# Altium PCB Main ESP32_IoT Gateaway.PcbDoc (part 2 of 4)
Units mm, origin at the board's own origin, x right, y up, seen from the top; angles counter-clockwise.
Board outline 125.73 x 73.66 mm, 4 copper layers (Top Layer, GND, Layer 2, Bottom Layer), stack 0.603 mm thick; 167 components, 121 nets, 681 pads, 324 vias.
Unrouted connection lines stored in the file: 132.
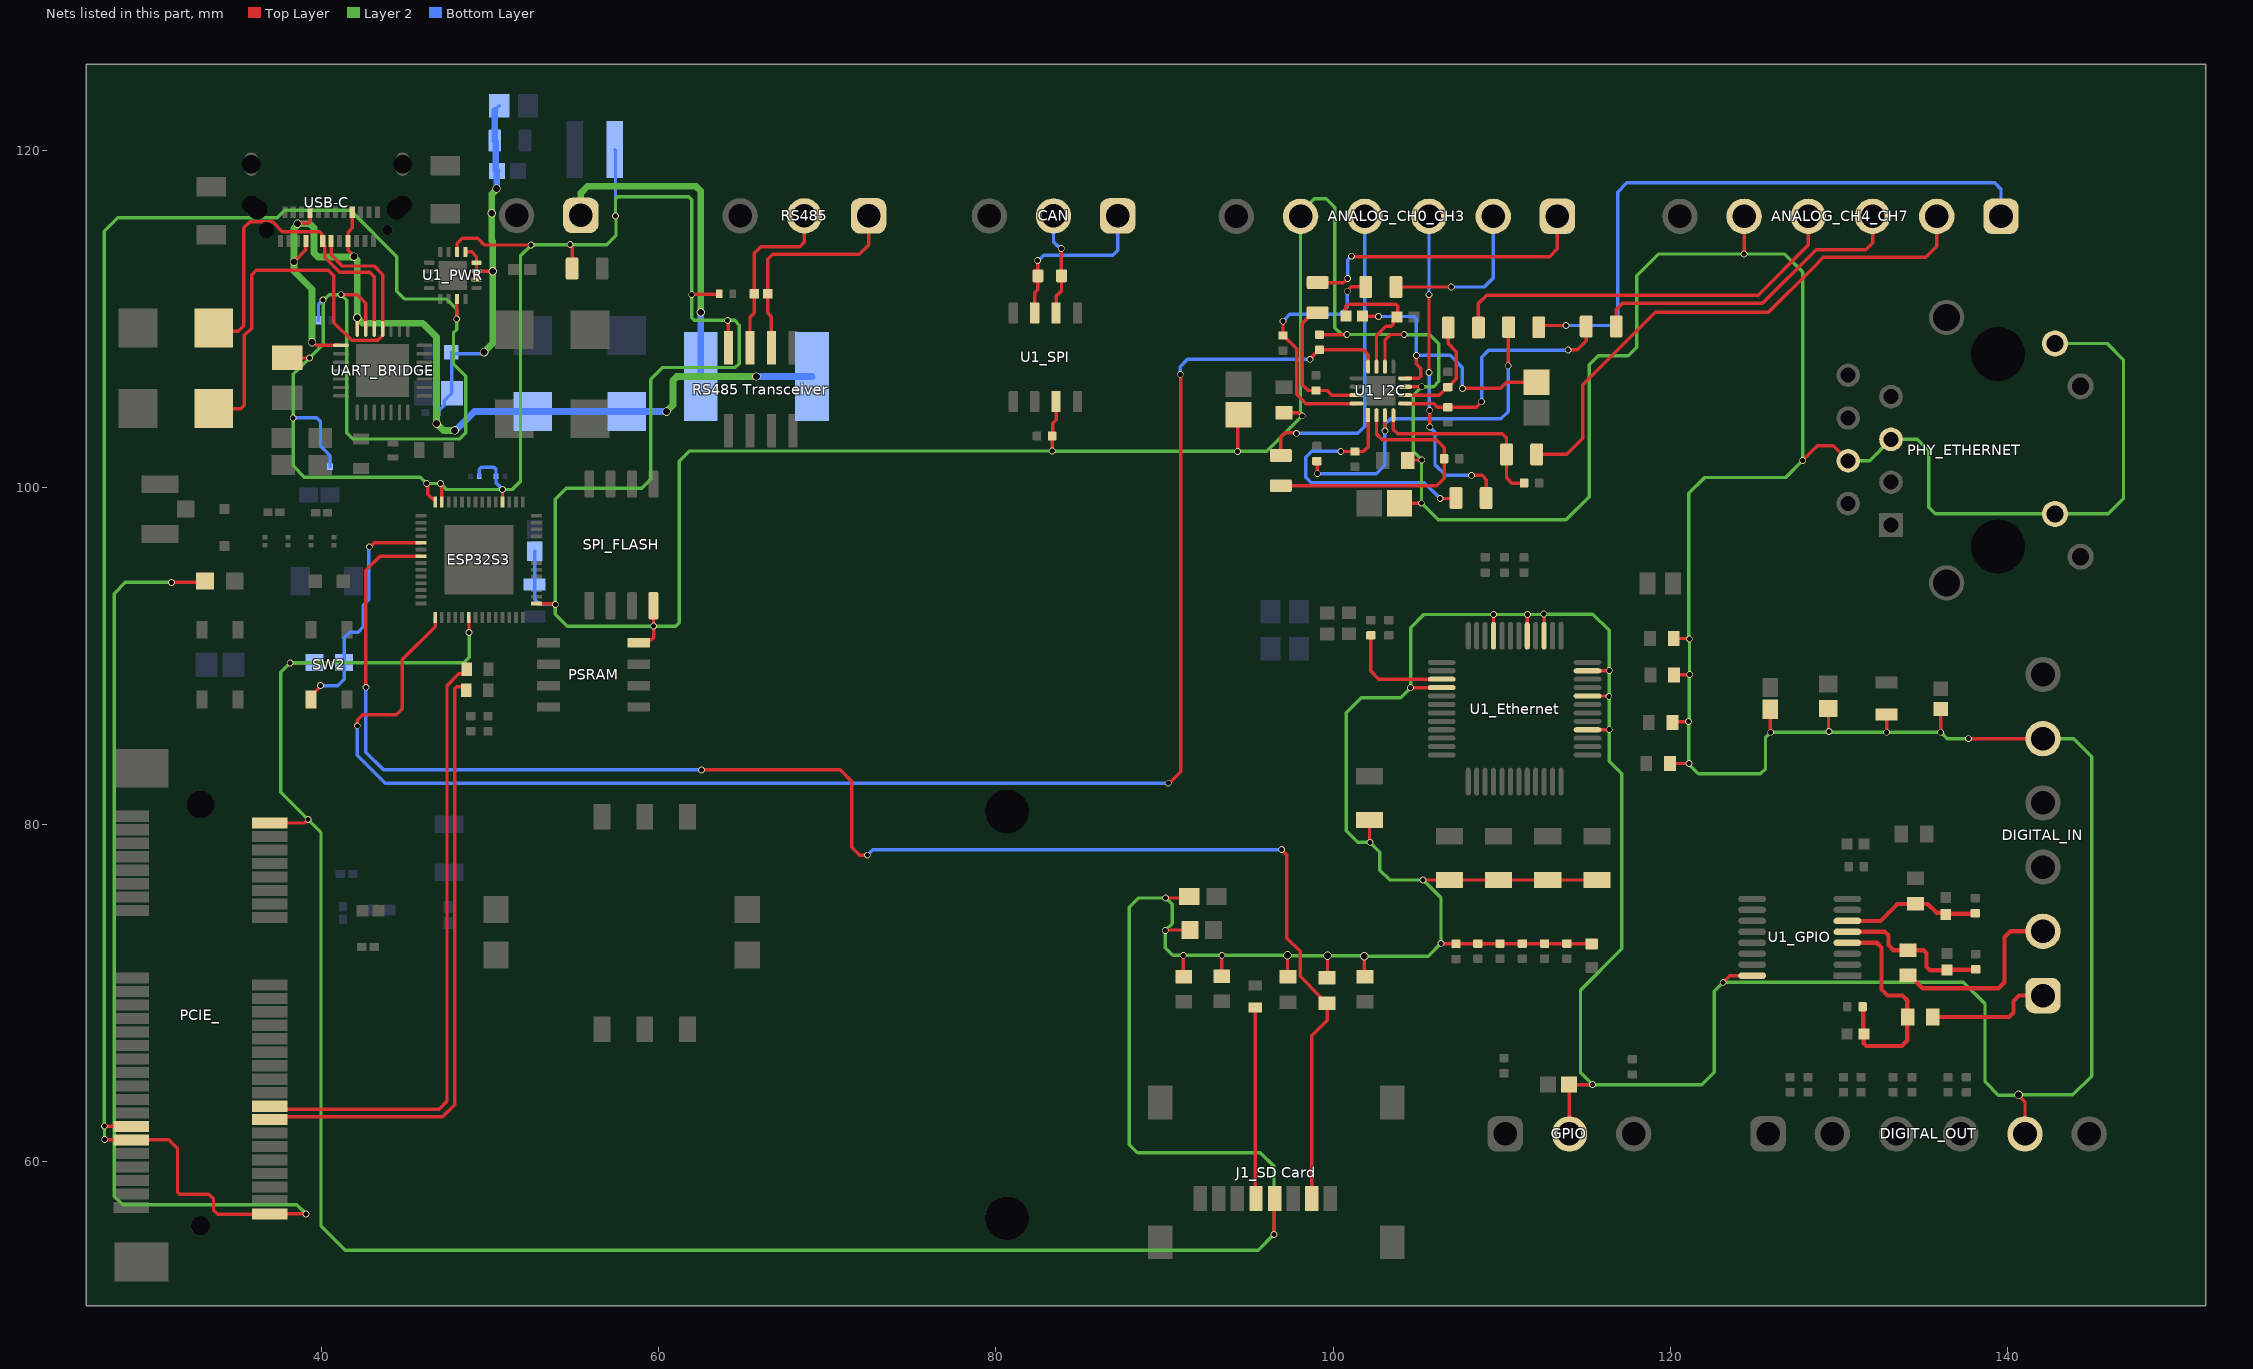
[diagram p4: the nets of this part, all layers, seen from the top]

## Part data (continued)
C6 C7_MAIN_PWR C11: library part CMP-2000-04982-2, "Multilayer Ceramic Capacitors 100nF ±10% 50V X7R SMD 0603", Capacitance=100nF, Case Code (Imperial)=0603, Case Code (Metric)=1608, Dielectric=X7R, Dielectric Material=Ceramic, Max Operating Temperature=125°C, Min Operating Temperature=-55°C, Package Quantity=1, Tolerance=10%, Voltage=50V, Case/Package=0603, Construction=Flat, Depth=0.8mm, Height=0.8mm, Lead Free="Lead Free", Length=1.6mm, Mount="Surface Mount", Number of Pins=2, Packaging="Tape and Reel", Radiation Hardening=No, REACH SVHC="No SVHC", Resistor Type=Ceramic, RoHS Compliant=Yes, Series=C, Termination=SMD/SMT, Thickness=0.037inch, Voltage Rating=50V, Voltage Rating (DC)=50V, Weight=7.1E-05oz, Width=0.031inch
C7: library part CMP-2000-05253-1, "CAP, Ceramic, 0.1 uF, 10%, 16 V, 0603, RoHS, Tape and Reel", Capacitance=0.1uF, Capacitance - nF=100nF, Capacitance - pF=100000pF, Case Code - in=0603, Case Code - mm=1608, Case Height=0.8mm, Case Length=1.6mm, Dielectric=X7R, Manufacturer=Murata, Maximum Operating Temperature=+125C, Minimum Operating Temperature=-55C, Operating Temperature Range=-55Cto+125C, Package / Case=0603(1608metric), Temperature Coefficient / Code=+/-15%, Tolerance=10%, Voltage Rating=16V, Brand=MurataElectronics, Case Width=0.8mm, Datasheet URL=https://datasheet.ciiva.com/29202/451467-da-01-en-vs-kondensator-0603-29202287.pdf, Datasheet Version=Dec-10, Dimensions=0.8mmWx1.6mmLx0.8mmH, Factory Pack Quantity=4000, Manufacturer URL=http://www.murata.com/, Packaging=Reel, Product=GeneralTypeMLCCs, Product Category=MultilayerCeramicCapacitorsMLCC-SMD/SMT, RoHS=Details, Series=GRM, Termination Style=SMD/SMT, Type=GeneralPurposeMLCC, Voltage Rating DC=16V
C8: library part CMP-2006-02792-2, "Chip Multilayer Ceramic Capacitors for General Purpose, 0603, 10uF, X5R, 15%, 20%, 6.3V", Capacitance=10uF, Case Code (Imperial)=0603, Case Code (Metric)=1608, Dielectric=X5R, Max Operating Temperature=85°C, Min Operating Temperature=-55°C, Package Quantity=4000, Tolerance=20%, Voltage=6.3V, Case/Package=0603, Depth=0.8mm, Height=0.8mm, Lead Free="Lead Free", Length=1.6mm, Material=Ceramic, Mount="Surface Mount", Packaging="Tape and Reel", Radiation Hardening=No, REACH SVHC="No SVHC", Termination=SMD/SMT, Thickness=0.035inch, Voltage Rating=6.3V, Voltage Rating (DC)=6.3V, Width=0.031inch
C9 C12: library part CMP-06035-022504-1, "Chip Multilayer Ceramic Capacitors for General Purpose, 0805, 1.0uF, X7S, 22%, 10%, 100V", Capacitance=1uF, Dielectric=X7S, Tolerance=10%, Voltage Rating (DC)=100V, Length=2mm, Thickness=1.25mm, Width=1.25mm
C10 C24: library part CMP-06035-033844-1, "Chip Multilayer Ceramic Capacitors for General Purpose, 0603, 10uF, X5R, 15%, 20%, 10V", Capacitance=10uF, Dielectric=X5R, Tolerance=20%, Voltage Rating (DC)=10V, Length=1.6mm, Thickness=800um, Width=800um
C10_Ethernet: library part CMP-001-00075-4, "Chip Capacitor, 10µF +/-20%, 10V, 0603, Thickness 1 mm", Case/Package=0603, Max Operating Temperature=85°C, Min Operating Temperature=-55°C, Tolerance=10%, Voltage Rating=10V, Mounting Technology=SMT, Pins=2
C13 C23: library part CMP-2007-04663-1, Manufacturer="AVX Interconnect / Elco", Part Number=0805YD105MAT2A
C14 C15: library part CMP-03422-000955-1, "CC0201 100 nF X5R 20.00% 10 V", Capacitance="100 nF", Manufacturer=Yageo, Manufacturer Part Number=CC0201MRX5R6BB104, Package=CC0201-BA, Temperature="-55°C to +85°C", Temperature Characteristic=X5R, Temperature Coefficient=15%, Temperature Range High=+85°C, Temperature Range Low=-55°C, Tolerance=0.2, Voltage Rating="10 V", Automotive=No, Category=Cap, ComponentLink2Description=Datasheet, ComponentLink2URL=http://www.yageo.com/documents/recent/UPY-GPHC_X5R_4V-to-50V_25.pdf, Device Class L1="Passive Components", Device Class L2=Capacitors, Device Class L3="Ceramic Capacitors", Footprint Url=http://www.yageo.com/exep/pages/download/literatures/UPY-C_GEN_24.pdf, Height=0.33mm, Ipc Land Pattern Name=CAPC6030X30, Lead Free=Yes, Material=Ceramic, Mouser Description="Cap Ceramic 0.1uF 10V X5R 20% SMD 0201 85°C Paper T/R", Octopart=https://octopart.com/cc0201mrx5r6bb104-yageo-82228190, RoHS=TRUE
C16 C17 C18 C19: library part CMP-2010-01517-2, "Chip Multilayer Ceramic Capacitors for General Purpose, 0201, 1.5pF, C0G, 30ppm/°C, 0.1pF, 50V", Capacitance=1.5pF, Case Code (Imperial)=0201, Case Code (Metric)=0603, Max Operating Temperature=125°C, Min Operating Temperature=-55°C, Package Quantity=15000, Voltage Rating=50V, Case/Package=0201, Length=0.024inch, Mount="Surface Mount", Packaging="Tape and Reel", Termination=SMD/SMT, Thickness=0.013inch, Voltage Rating (DC)=50V, Width=0.012inch
C20: library part CMP-06035-027821-1, "Cap Ceramic 4.7uF 16V X7R 10% Pad SMD 1206 Soft Termination  +125°C Automotive T/R"
C21 C_485: library part CMP-06035-062118-1, "Chip Multilayer Ceramic Capacitors for General Purpose, 0402, 0.10uF, X7R, 15%, 20%, 50V", RoHS Compliant=Yes
C22: library part CMP-1033-00660-2, Manufacturer="AVX Interconnect / Elco", Part Number=02016D104KAT4A
C_BULK: library part CMP-001-00082-4, "Chip Capacitor, 47µF +/-40%, 6.3V, 0805, Thickness 1.45 mm", Case/Package=0805, Max Operating Temperature=85°C, Voltage Rating=6.3V, Min Operating Temperature=-55°C, Tolerance=10%, Mounting Technology=SMT, Pins=2
C_USIM C_USIM_CLK C_USIM_RST: library part CMP-2008-03705-2, "Ceramic Capacitor for Automotive 33pF ±5% 50VDC C0G 0402 Paper T/R", Capacitance=33pF, Case Code (Imperial)=0402, Case Code (Metric)=1005, Dielectric=C0G, Max Operating Temperature=125°C, Min Operating Temperature=-55°C, Package Quantity=10000, Ratings=AEC-Q200, Tolerance=5%, Voltage Rating=50V, Case/Package=0402, Depth=0.5mm, Height=0.5mm, Lead Free="Lead Free", Length=1mm, Mount="Surface Mount", Packaging="Tape and Reel", Termination=SMD/SMT, Thickness=0.022inch, Voltage Rating (DC)=50V, Weight=0.000212oz, Width=0.02inch
CAN: library part CMP-1502-01887-3, "322; 3.81mm Pitch Straight Pluggable Term Block; PCB Header; Through Hole; 3 Way", Current=10A, Color=Green, Min Operating Temperature=-40°C, Max Operating Temperature=105°C, Voltage=300V, Width=12.82mm, Length=10.5mm, Lead Pitch=3.81mm, Height=7.2mm, Gender=Male, Contact Material=Tin, Contact Plating=Tin, Current Rating=10A, Packaging=Box, RoHS=Compliant, Pitch=3.81mm, Termination=Solder, Number of Rows=1, Number of Positions Per Level=3, Number of Pins=3, Number of Levels=1, Number of Contacts=3, Voltage Rating=300V, Mount="Through Hole"
CIN: library part CMP-001-00015-6, "Chip Capacitor, 10 uF, +/- 10%, 16 V, 0805 (2012 Metric)", Capacitor Type=Ceramic, Case/Package=0805, Max Operating Temperature=85°C, Min Operating Temperature=-55°C, Tolerance=10%, Voltage Rating=16V, Mounting Technology=SM, Pins=2, RoHS Compliant=True
COUT: library part CMP-001-00081-4, "Chip Capacitor, 22µF +/-40%, 16V, 0805, Thickness 1.45 mm", Case/Package=0805, Max Operating Temperature=85°C, Min Operating Temperature=-55°C, Tolerance=5%, Voltage Rating=16V, Mounting Technology=SMT, Pins=2
CRYSTAL: library part CMP-27762-015630-1, "Crystal 40MHz ±20ppm (Tol) ±100ppm (Stability) 12pF FUND 35Ω Automotive 4-Pin Ultra Mini-CSMD T/R", Case/Package=SMD/SMT, ESR (Equivalent Series Resistance)=35R, Frequency=40MHz, Frequency Stability=100ppm, Frequency Tolerance=20ppm, Load Capacitance=12pF, Max Operating Temperature=125°C, Min Operating Temperature=-40°C, Ratings=AEC-Q200, Height=0.031inch, Length=0.126inch, Mount="Surface Mount", Packaging="Tape and Reel", RoHS Compliant=Yes, Series=ABM8AIG, Width=0.098inch
CSS: library part CMP-001-00086-1, "Ceramic Capacitor, YES, Ceramic, 50V, 10% +Tol, 10% -Tol, X7R, 15% TC, 0.0033uF, Surface Mount, 1005M/0402", Case/Package=0402, Dielectric=X7R, Dielectric Material=Ceramic, Manufacturer Lifecycle Status="IN PRODUCTION", Max Operating Temperature=125°C, Min Operating Temperature=-55°C, Ratings=AEC-Q200, Voltage Rating=50V, Export Control Classification Number (ECCN) Code=EAR99, Harmonized Tariff Schedule (HTS) Code=8532.24.00.20, Height=500µm, Introduction Date=2013-11-20, Length=1mm, Lifecycle Status=Production, Material=Ceramic, Mounting Technology="Surface Mount", Number of Terminals=2, REACH SVHC=Yes, RoHS=Compliant, Thickness=500µm, Voltage Rating (DC)=50V, Width=500µm
D1: library part CMP-14432-000001-1, "TVS DIODE 5V 14V SOD323"
D2 D3 D4 D5 D6 D7: library part CMP-03913-71101600-2, "TVS diode [Würth Elektronik] 824520581 TVS diode", Clamping Voltage=93.6V, Leakage Current=1µA, Max Breakdown Voltage=67.8V, Max Operating Temperature=150°C, Min Operating Temperature=-65°C, Peak Pulse Current=6.5A, Peak Pulse Power=600W, Power Line Protection=No, Reverse Standoff Voltage=58V, Composition=Zener, Height=2.4mm, Length=4.32mm, Min Breakdown Voltage=67.8V, Mount="Surface Mount", Number of Pins=2, Number of Unidirectional Channels=1, Packaging="Cut Tape", Polarity=Unidirectional, REACH SVHC=Unknown, RoHS=Compliant, Width=3.62mm
ESP32S3: library part CMP-031-00006-2, "IC RF TxRx + MCU Bluetooth, WiFi 802.11b/g/n, Bluetooth v5.0 2.412GHz ~ 2.484GHz 56-VFQFN Exposed Pad", Case/Package=None, Availability="In Stock", Check_prices=https://www.snapeda.com/parts/ESP32-S3/Espressif+Systems/view-part/?ref=eda, Component Type=Standard, Design Item ID=ESP32-S3, MF="Espressif Systems", MP=ESP32-S3, Pins=57, Price=None, Purchase-URL=https://pricing.snapeda.com/search/part/ESP32-S3/?ref=eda, SnapEDA_Link=https://www.snapeda.com/parts/ESP32-S3/Espressif+Systems/view-part/?ref=snap, Source=ESP32-S3.SchLib
F1: library part CMP-005-00013-1, "PTC fuse, self-resetting, SMD 2920, 15 V (DC), 40 A, 5 A (trip), 3 A (hold), 2920L300/15DR", Ambient Temperature Range High=85°C, Case Code (Imperial)=2920, Case Code (Metric)=7351, Current Rating=40A, Hold Current=3A, Max Voltage Rating (DC)=15V, Maximum Resistance 1 Hour (R1max)=48mΩ, Min Operating Temperature=-40°C, Minimum Resistance Initial (Rmin)=15mΩ, Power Dissipation=1.5W, Ratings=TUV, Trip Current=5A, Approvals="TUV, cULus", Case/Package=2920, China RoHS=Compliant, Export Control Classification Number (ECCN) Code=EAR99, Harmonized Tariff Schedule (HTS) Code=8533.40.80.70, Height=1.25mm, Introduction Date=2006-06-15, Lead Free="Lead Free", Length=7.98mm, Lifecycle Status=Production, Max Current Rating=40A, Max Operating Temperature=85°C, Mounting Technology="Surface Mount", Number of Terminals=2, Operating Supply Voltage=15V, REACH SVHC=Yes, RoHS=Compliant, Termination=SMD/SMT, Time to Trip=20s, Voltage Rating=15V, Voltage Rating (DC)=15V, Width=5.44mm, Working Voltage=15V
GPIO: library part CMP-002-00075-1, "Wurth Elektronik 3.81mmpitch3pPlug-in terminal blocks socket head, 322series, 300.0 v, welding", Color=Green, Current=10A, Manufacturer Lifecycle Status=ACTIVE, Max Operating Temperature=105°C, Min Operating Temperature=-40°C, Voltage=300V, Contact Material=Tin, Contact Plating=Tin, Current Rating=10A, Gender=Male, Height=7.2mm, Lead Pitch=3.81mm, Length=12.62mm, Lifecycle Status=Production, Mounting Technology="Through Hole", Number of Contacts=3, Number of Levels=1, Number of Positions Per Level=3, Number of Rows=1, Packaging=Box, Pins=3, Pitch=3.81mm, RoHS=Compliant, Termination=Solder, Voltage Rating=300V, Width=12.82mm, YEOL="1 = Estimated lifetime > 10 years"
"J1_SD Card": library part CMP-1502-00164-3, "Conn, Memory Skt, Microsd, 8POS, Hinged Rohs Compliant: Yes", Color=Black, Current Rating=500mA, Insulation Resistance=1GΩ, Max Operating Temperature=85°C, Min Operating Temperature=-25°C, Operating Supply Voltage=100V, Connector Type=Connector, Contact Material=Gold, Contact Plating=Gold, Height=1.95mm, Length=14.5mm, Memory Type=FLASH, Mount="Surface Mount", Number of Contacts=8, Number of Pins=8, Number of Positions=8, Packaging="Tape and Reel", REACH SVHC=Unknown, RoHS=Compliant, Voltage Rating=100V, Width=13.5mm
J_PWR: library part CMP-002-00077-1, "Terminal Block, Header, 2Ways, Th R/A;", Color=Green, Current=10A, Manufacturer Lifecycle Status=ACTIVE, Max Operating Temperature=105°C, Min Operating Temperature=-40°C, Voltage=300V, Contact Material=Tin, Contact Plating=Tin, Current Rating=10A, Gender=Male, Height=7.2mm, Lead Pitch=3.81mm, Length=8.81mm, Lifecycle Status=Production, Mounting Technology="Through Hole", Number of Contacts=2, Number of Levels=1, Number of Positions Per Level=2, Number of Rows=1, Packaging=Box, Pins=2, Pitch=3.81mm, RoHS=Compliant, Termination=Solder, Voltage Rating=300V, Width=9.01mm, YEOL="1 = Estimated lifetime > 10 years"
L1: library part CMP-06042-007532-1, "Wire Wound RF Inductor 24nH ±2% 280mA 0.52Ω 0402 (1005)", Case Code (Imperial)=0402, Case Code (Metric)=1005, Current=270mA, Current Rating=280mA, DC Resistance (DCR)=520mR, Inductance=24nH, Inductance Tolerance=2%, Max Operating Temperature=125°C, Min Operating Temperature=-55°C, Package Quantity=10000, Self Resonant Frequency=3.5GHz, Test Frequency=100MHz, Case/Package=0402, Core Material=Air, DC Current=280mA, Depth=0.6mm, Height=0.5mm, Lead Free="Lead Free", Length=1mm, Max DC Current=280mA, Military Standard=Not, Mount="Surface Mount", Number of Pins=2, Packaging="Tape and Reel", Q Factor=25, REACH SVHC="No SVHC", Shielding=Unshielded, Termination=SMD/SMT, Tolerance=2%, Weight=2.8E-05oz, Width=0.02inch
"L1_Power Reg": library part CMP-006-00022-1, "General Purpose Inductor, 2.2uH, 20%, 1 Element, Composite-Core, SMD, 1616", Ambient Temperature Range High=125°C, Case/Package=1616, DC Resistance (DCR)=23.5mΩ, Max Current Rating=8A, Min Operating Temperature=-40°C, Ratings=AEC-Q200, Saturation Current=3.1A, Self Resonant Frequency=38MHz, Test Frequency=1MHz, Tolerance=20%, Core Material=Composite, ESR=23.5mΩ, Height=2.1mm, Lead Free="Contains Lead", Length=4mm, Lifecycle Status=Obsolete, Max DC Current=8A, Max Operating Temperature=125°C, Number of Circuits=1, Number of Terminals=2, REACH SVHC=Yes, RMS Current (Irms)=8A, RoHS=Compliant, Shielding=Shielded, Termination=SMD/SMT, Width=4mm
L2: library part CMP-006-00023-1, Case/Package=None, Availability=Unavailable, Component Type=Standard, Design Item ID=ATFC-0201HQ-2N0B-T, MF="{'manufacturer': u'Abracon LLC'}", MP=ATFC-0201HQ-2N0B-T, Pins=2, Price=None, Source=ATFC-0201HQ-2N0B-T.SchLib
L3 L4: library part CMP-06042-013213-1, "Film type RF Inductor 2.7nH ±0.1nH 500mA 0.2Ω 0201 (0603)", Case Code (Imperial)=0201, Case Code (Metric)=0603, Current=350mA, Current Rating=500mA, DC Resistance (DCR)=200mR, Inductance=2.7nH, Max Operating Temperature=125°C, Min Operating Temperature=-55°C, Package Quantity=15000, Resistor Type="Thin Film", Self Resonant Frequency=6GHz, Test Frequency=500MHz, Tolerance=3%, Case/Package=0201, Core Material=Non-Magnetic, DC Current=500mA, Depth=0.33mm, Height=0.3mm, Height - Seated (Max)=0.013inch, Lead Free="Lead Free", Length=0.024inch, Max DC Current=500mA, Military Standard=Not, Mount="Surface Mount", Packaging="Tape and Reel", Q Factor=14, Radiation Hardening=No, REACH SVHC="No SVHC", Shielding=Unshielded, Termination=SMD/SMT, Width=0.3mm
PCIE_: library part CMP-018-000000-1, Package=None, Availability=Unavailable, Component Type=Standard, Design Item ID=679105700, MP=679105700, Pin Count=52, Price=None, Source=679105700.SchLib
PHY_ETHERNET: library part CMP-2000-05321-1, "10/100 Base-TX RJ45 1 x 1 Tab-Down with LEDs Integrated Magnetics Connector, 0 to 70 degC, 12-Pin THD, RoHS, Tube", Manufacturer=Pulse, Package Description="12-Pin Through Hole Device, Body 16.26 x 21.59 mm, Pitch 1.27 mm", Body Orientation=RightAngle, Category=ConnectorTelephoneandTelecom, Datasheet URL=http://datasheet.octopart.com/J0011D21BNL-Pulse-datasheet-120436.pdf, Datasheet Version="Rev. D, 05/2006", Gender=F, Manufacturer URL=http://www.pulseelectronics.com/, Mounting=ThroughHole, Number of Contacts=8, Package Reference=J0011D21BNL, Pitch=2.54mm, Termination Method=Solder, Type=RJ-45
PSRAM: library part CMP-014-000000-2, "2 MB PSRAM SPI", Manufacturer_Name="AP Memory", Component Type=Standard, Copyright="Copyright (C) 2026 Ultra Librarian. All rights reserved.", Design Item ID=APS1604M-3SQR-SN, Manufacturer_Part_Number=APS1604M-3SQR-SN, Pin Count=8, RefDes=RefDes, Source=APS1604M-3SQR-SN.SchLib, Type=Type
PWR_LED: library part CMP-44529-000047-1, "LED GREEN CLEAR CHIP SMD", Case Code (Imperial)=0603, Case Code (Metric)=1608, Color=Green, Forward Current=20mA, Forward Voltage=3.3V, Max Operating Temperature=85°C, Min Operating Temperature=-40°C, Package Quantity=2000, Case/Package=0603, Dominant Wavelength=525nm, Height=0.95mm, Illumination Color=Green, Lead Free="Lead Free", Length=1.6mm, Lens Style=Clear, Luminous Intensity=780mcd, Mount="Surface Mount", Packaging="Tape and Reel", Test Current=20mA, Viewing Angle=60°, Width=0.8mm
R1_Ethernet R2_Ethernet R4_Ethernet R5_Ethernet R6_Ethernet: library part CMP-009-00179-1, "Res Thick Film 1206 10K Ohm 1% 0.25W(1/4W) ±100ppm/C Pad SMD Automotive T/R", Ambient Temperature Range High=70°C, Case/Package=1206, Manufacturer Lifecycle Status=ACTIVE, Max Operating Temperature=155°C, Min Operating Temperature=-55°C, Operating Supply Voltage=200V, Power Rating=250mW, Ratings=AEC-Q200, Temperature Coefficient=100ppm/°C, Tolerance=1%, China RoHS=Non-Compliant, Composition="Thick Film", Export Control Classification Number (ECCN) Code=EAR99, Harmonized Tariff Schedule (HTS) Code=8533.21.00.30, Height=550µm, Introduction Date=2018-03-13, Length=3.1mm, Lifecycle Status=Production, Mounting Technology="Surface Mount", Number of Terminals=2, Packaging="Cut Tape", REACH SVHC=Yes, RoHS=Compliant, Schedule B="8533210025, 8533210025", Voltage Rating=200V, Voltage Rating (DC)=200V, Width=1.55mm, Working Voltage=200V
R1_GPIO R11_Ethernet R11_GPIO R12_Ethernet R13_GPIO R15_GPIO R17_GPIO: library part CMP-009-00132-3, "Chip Resistor, 330 Ohms, +/-5 %, 63 mW, -55 to 155 degC, 0402", Case/Package=0402, Max Operating Temperature=155°C, Min Operating Temperature=-55°C, Power=63mW, Tolerance=5%, Pins=2
R1_RS485: library part CMP-1010-00052-1, "120R 0.05W 5% 0201 (0603 Metric)  SMD", Case-EIA=0201, Case-Metric=0603, Power="0.05 W", Tolerance="5 %", Technology=SMT
R1_TYPEC R2_TYPEC: library part CMP-1014-00091-2, "RES Thick Film, 5.1kΩ, 5%, 0.25W, 200ppm/°C, 1206", Case/Package=1206, Max Operating Temperature=155°C, Max Power Dissipation=250mW, Min Operating Temperature=-55°C, Package Quantity=20000, Resistance=5.1kR, Temperature Coefficient=200ppm/°C, Tolerance=5%, Composition="Thick Film", Features="Automotive AEC-Q200", Height=0.024inch, Lead Free="Lead Free", Length=0.126inch, Number of Terminations=2, Packaging="Tape and Reel", Width=0.063inch
R2_CAN: library part CMP-009-00176-3, "Chip Resistor, 120 Ohms, +/-5 %, 0.1 W, -55 to 155 degC, 0603", Case/Package=0603, Max Operating Temperature=155°C, Min Operating Temperature=-55°C, Power=100mW, Tolerance=5%, Pins=2
R2_GPIO R7_I2C R12_GPIO R14_GPIO R16_GPIO R18_GPIO: library part CMP-009-00149-3, "Chip Resistor, 10 kOhms, +/-1 %, 63 mW, -55 to 125 degC, 0402", Case/Package=0402, Max Operating Temperature=155°C, Min Operating Temperature=-55°C, Power=63mW, Tolerance=1%, Pins=2
R2_USB R3_USB: library part CMP-2000-04180-1, Manufacturer=Yageo, Part Number=RC0603FR-1022RL
R3 R4 R5 R6 R7: library part CMP-009-00017-5, "Chip Resistor, 10 KOhm, +/- 1%, 01 W, -55 to 155 degC, 0603 (1608 Metric)", Case/Package=0603, Max Operating Temperature=155°C, Min Operating Temperature=-55°C, Power=100mW, Tolerance=1%, Voltage Rating=50V, Mounting Technology=SM, Pins=2, RoHS Compliant=True
R3_Ethernet: library part CMP-250906-053812-1, "RES Thin Film,  12.4kΩ, 0.1%, 0.1W, 25ppm/°C, 0805", RoHS Compliant=Yes
R3_GPIO R5_GPIO R7_GPIO R9_GPIO: library part CMP-009-00014-5, "Chip Resistor, 1 KOhm, +/-1%, 0.1 W, -55 to 155 degC, 0603 (1608 Metric)", Case/Package=0603, Max Operating Temperature=155°C, Min Operating Temperature=-55°C, Power=100mW, Tolerance=1%, Voltage Rating=50V, Mounting Technology=SM, Pins=2, RoHS Compliant=True
R4_GPIO R6_GPIO R8_GPIO R10_GPIO: library part CMP-009-00019-5, "Chip Resistor, 10 KOhm, +/- 1%, 63 mW, -55 to 155 degC, 0402 (1005 Metric)", Case/Package=0402, Max Operating Temperature=155°C, Min Operating Temperature=-55°C, Power=63mW, Tolerance=1%, Voltage Rating=50V, Mounting Technology=SM, Pins=2, RoHS Compliant=True
R4_I2C R5_I2C: library part CMP-009-00031-5, "Chip Resistor, 4.7 KOhm, +/- 1%, 0.1 W, -55 to 155 degC, 0603 (1608 Metric)", Case/Package=0603, Max Operating Temperature=155°C, Min Operating Temperature=-55°C, Power=100mW, Tolerance=1%, Mounting Technology=SM, Pins=2, RoHS Compliant=True
R7_Ethernet R8_Ethernet R9_Ethernet R10_Ethernet: library part CMP-1659-00036-1, "General Purpose Chip Resistor, 49.9 Ohm, +/- 1%, -55 to 155 degC, 0603 (1608 Metric), RoHS, Tape and Reel", Case\Package=LQFP, Max Operating Temperature="85 degC", Max Supply Voltage="3.63 V", Min Operating Temperature="-40 degC", Min Supply Voltage="2.97 V", Package Quantity=250, ComponentLink1Description="Manufacturer URL", ComponentLink1URL=http://www.yageo.com/, ComponentLink2Description=Datasheet, ComponentLink2URL=https://datasheet.ciiva.com/11808/0900766b80f96399-11808223.pdf, DatasheetVersion="Rev. 4, 04/2009", Interface=SPI, PackageDescription="2-Pin Surface Mount Device, Body 1.6 x 0.8 mm", PackageReference=0603, Packaging=Tray, Pins=48, RoHSCompliant=true
R8: library part CMP-2000-06939-1, "Chip Resistor, 33 Ohm, +/- 1%, 0.1 W, -55 to 155 degC, 0603 (1608 Metric), RoHS, Tape and Reel", Case Code - in=0603, Case Code - mm=1608, Manufacturer=Yageo, Operating Temperature Range=-55Cto+155C, Package / Case=0603(1608metric), Package Description="2-Pin Surface Mount Device, Body 1.6 x 0.8 mm", Power Rating=100mW, Resistance=33Ohms, Temperature Coefficient=100PPM/C, Tolerance=1%, Voltage Rating=75V, Brand=Yageo, Datasheet URL=http://www.yageo.com/documents/recent/PYu-RC_Group_51_RoHS_L_7.pdf, Datasheet Version="Rev. 7, 05/2017", Height=0.45mm, Length=1.6mm, Manufacturer URL=http://www.yageo.com/, Mounting Technology=SurfaceMount, Package Reference=0603, Packaging=Reel, Product=ThickFilmResistorsGeneralPurpose, Product Category=ThickFilmResistors, RoHS=True, Series=RC, Termination Style=SMD/SMT, Type=GeneralPurposeChipResistorSurfaceMount, Unit Weight=0.000071oz, Width=0.8mm
R8_I2C R9_I2C R10_I2C R11_I2C R12_I2C R13_I2C R14_I2C R15_I2C: library part CMP-009-00118-3, "Chip Resistor, 1 kOhms, +/-5%, 125 mW, -55 to 155 degC, 0805", Case/Package=0805, Max Operating Temperature=155°C, Min Operating Temperature=-55°C, Power=125mW, Tolerance=5%, Pins=2
R9 R_RST: library part CMP-03412-040683-1, "RES 10kΩ 5.00% 0.2W 0603"
R_ADDR_HIGH R_ADDR_LOW: library part CMP-009-00005-5, "Chip Resistor, 0 Ohm, 0.1 W, -55 to 155 degC, 0402 (1005 Metric)", Case/Package=0402, Max Operating Temperature=155°C, Min Operating Temperature=-55°C, Power=100mW, Tolerance=5%, Voltage Rating=50V, Mounting Technology=SM, Pins=2, RoHS Compliant=True
R_PWR: library part CMP-03211-010976-1, "Res Thin Film 1206 1.0KΩ 0.1% 0.25W 15ppm/°C Molded SMD", Manufacturer="TE Connectivity", Manufacturer Part Number=RP73D2B1K0BTDF, Package=RP732B, Power Rating=0.25W, Resistance=1.0KΩ, Temperature="-55°C to 155°C", Temperature Coefficient=15ppm/°C, Temperature Range High=155°C, Temperature Range Low=-55°C, Tolerance=0.1%, Voltage Rating=200V, Automotive=No, Category=Res, ComponentLink2Description=Datasheet, ComponentLink2URL=https://www.te.com/commerce/DocumentDelivery/DDEController?Action=showdoc&DocId=Data+Sheet%7F1773272%7FL%7Fpdf%7FEnglish%7FENG_DS_1773272_L.pdf%7F8-1879255-6, Composition="Thin Film", Device Class L1="Passive Components", Device Class L2=Resistors, Device Class L3="Chip SMD Resistors", Height=0.65mm, Ipc Land Pattern Name=RESC305155X55, Lead Free=Yes, Octopart=https://octopart.com/rp73d2b1k0btdf-te+connectivity-22741139, octopart_url=https://octopart.com/rp73d2b1k0btdf-te+connectivity-22741139, Packaging="1000 Reel", RoHS=TRUE, Series=RP73
R_SIM_CLK R_SIM_RST RSIM: library part CMP-03211-011400-1, "RES SMD 0 OHM JUMPER 1/16W 0402", Case Code (Imperial)=0402, Case Code (Metric)=1005, Insulation Resistance=1GR, Max Operating Temperature=125°C, Min Operating Temperature=-55°C, Number of Resistors=1, Package Quantity=10000, Power Rating=63mW, Resistance=0mR, Resistor Type="Thick Film", Temperature Coefficient=200ppm/°C, Tolerance=0%, Voltage Rating=50V, Case/Package=0402, Depth=0.5mm, ELV=Compliant, Height=0.35mm, Length=1mm, Mount="Surface Mount", Number of Pins=2, Number of Terminations=2, Packaging="Tape and Reel", Radiation Hardening=No, RoHS Compliant=Yes, Series=CRG, Technology="THICK FILM", Termination=Solder, Voltage Rating (DC)=50V, Weight=2.3E-05oz, Width=0.5mm
R_SIM_PU: library part CMP-2003-03512-1, Manufacturer=Yageo, Part Number=RC1206FR-1015KL
RF_COAXIAL: library part CMP-03357-000011-1, "UMCC MICRO-COAX RECEPTACLE, GEN"
RS485: library part CMP-1502-01887-3, "322; 3.81mm Pitch Straight Pluggable Term Block; PCB Header; Through Hole; 3 Way", Color=Green, Current=10A, Max Operating Temperature=105°C, Min Operating Temperature=-40°C, Voltage=300V, Contact Material=Tin, Contact Plating=Tin, Current Rating=10A, Gender=Male, Height=7.2mm, Lead Pitch=3.81mm, Length=10.5mm, Mount="Through Hole", Number of Contacts=3, Number of Levels=1, Number of Pins=3, Number of Positions Per Level=3, Number of Rows=1, Packaging=Box, Pitch=3.81mm, RoHS=Compliant, Termination=Solder, Voltage Rating=300V, Width=12.82mm
"RS485 Transceiver": library part CMP-05679-000038-1, "IC TXRX RS485/422 10MBPS 8SOIC", Manufacturer="Maxim Integrated", Max Supply Voltage=3.6V, Min Supply Voltage=3V, Nominal Supply Current=0.95-1.1mA, Package=S8-5, Temperature="-40°C to +85°C", Temperature Range High=+85°C, Temperature Range Low=-40°C, Automotive=No, Category=IC, ComponentLink2Description=Datasheet, ComponentLink2URL=https://datasheets.maximintegrated.com/en/ds/MAX3483E-MAX3491E.pdf, Data Rate=15Mbits/s, Device Class L1="Integrated Circuits (ICs)", Device Class L2="Interface ICs", Device Class L3="RS-232 / RS-422 / RS-485 Interface ICs", Digikey Description="IC TXRX RS485/422 10MBPS 8SOIC", Footprint Url=https://pdfserv.maximintegrated.com/land_patterns/90-0096.PDF, Height=1.75mm, Interface=RS-485,RS-422, Lead Free=Yes, Manufacturer Part Number=MAX3485EESA+, Mouser Description="RS-422/RS-485 Interface IC 3.3V 12Mbps Transceiver", Number Of Receivers=1, Number Of Transmitters=1, Octopart=https://octopart.com/max3485eesa%2B-maxim+integrated-39731903, RoHS=TRUE, Simplex Duplex="Half Duplex", Standoff Height=0.1mm
SIM_card: library part CMP-1502-00155-3, "WR-CRD Mini SIM Card Connector Header Shielded", Current Rating=500mA, Insulation Resistance=500MΩ, Max Operating Temperature=85°C, Min Operating Temperature=-25°C, Operating Supply Voltage=50V, Connector Type="Connector, Socket", Contact Material=Copper, Contact Plating=Gold, Height=1.8mm, Length=16.4mm, Mount="Surface Mount", Number of Contacts=6, Number of Pins=6, Number of Positions=6, Packaging="Tape and Reel", REACH SVHC=Unknown, RoHS=Compliant, Width=16.3mm
SPI_FLASH: library part CMP-012-000000-2, "8 MB flash SPI", Component Type=Standard, Design Item ID=Component_1, Pin Count=8, Source=W25Q64JVSSIQ.SchLib
SW1 SW2: library part CMP-10040-000001-2, "SWITCH TACTILE SPST-NO 0.05A 16V", Case/Package=SMD/SMT, Color=Black, Current Rating=50mA, Max Operating Temperature=85°C, Min Operating Temperature=-40°C, Operating Force=160gf, Package Quantity=2900, Voltage Rating (DC)=16V, Actuator Type=Standard, Contact Plating=Silver, Depth=4.6mm, Illumination Type=Non-Illuminated, Lead Free="Lead Free", Length=3.2mm, Max Current Rating=50mA, Mechanical Life=150000Cycles, Mount="Surface Mount", Orientation=Straight, Packaging="Tape and Reel", RoHS Compliant=Yes, Switch Function=Off-Mom, Switch Travel=0.15mm, Termination=J-Bend, Throw Configuration=SPST
U1_Ethernet: library part CMP-020-00020-3, "Hardwired TCP/IP Embedded Ethernet Controller, 3.3 V, 25 MHz, -40 to 85 degC, 48-Pin LQFP, RoHS, Tray", Case/Package=LQFP, Manufacturer=WIZnet, Max Operating Temperature=85°C, Max Supply Voltage=3.63V, Min Operating Temperature=-40°C, Min Supply Voltage=2.97V, Package Description="48-Pin Low-profile Quad Flat Package, Body 7.00 x 7.00 mm, Pitch 0.50 mm", Package Quantity=250, Package Reference=LQFP-48, Datasheet URL=http://wizwiki.net/wiki/lib/exe/fetch.php?media=products:w5500:w5500_ds_v106e_141230.pdf, Datasheet Version="Rev. 1.0.6, 12/2014", Interface=SPI, Manufacturer URL=http://www.wiznet.co.kr/, Mounting Technology=SM, Packaging=Tray, Pins=48, RoHS Compliant=True
U1_GPIO: library part CMP-031-00008-1, "10mA 25mA I2C 8 1.65V 5.5V 400KHz yes TSSOP-16 SMD mount，glue mount 1.2mm(height)", Ambient Temperature Range High=85°C, Case/Package=TSSOP, Frequency=400kHz, Manufacturer Lifecycle Status=ACTIVE, Max Junction Temperature (Tj)=100°C, Max Supply Voltage=5.5V, Min Operating Temperature=-40°C, Min Supply Voltage=1.65V, Height=1.2mm, Interface=I2C, Lead Free="Lead Free", Length=5mm, Lifecycle Status=Production, Max Operating Temperature=85°C, Mounting Technology="Surface Mount", Number of Channels=8, Number of I/Os=8, Number of Outputs=8, Packaging="Cut Tape (CT)", Pins=16, RoHS=Compliant, Schedule B="8542390000, 8542390000", Thickness=1mm, Width=4.4mm
U1_I2C: library part CMP-031-00007-1, "IC ADC 12BIT SAR 16WQFN / 12 Bit Analog to Digital Converter 8 Input 1 SAR 16-WQFN (3x3)", Ambient Temperature Range High=85°C, Manufacturer Lifecycle Status=ACTIVE, Max Junction Temperature (Tj)=125°C, Max Supply Voltage=5.5V, Min Operating Temperature=-40°C, Min Supply Voltage=1.65V, Height=800µm, Interface=I2C, Length=3mm, Lifecycle Status=Production, Max Operating Temperature=85°C, Number of Channels=8, Number of Converters=1, Pins=16, RoHS=Compliant, Thickness=750µm, Width=3mm
U1_PWR: library part CMP-011-00013-1, "3-17V 3A Step-Down Converter in 3x3 QFN Package 16-VQFN -40 to 125", Case/Package=VQFN, Manufacturer Lifecycle Status=ACTIVE, Max Operating Temperature=125°C, Max Output current=3A, Max Output Voltage=3.3V, Max Supply Voltage=17V, Min Input Voltage=3V, Min Operating Temperature=-40°C, Quiescent Current=17µA, Switching Frequency=2.5MHz, Height=1mm, Lead Free="Lead Free", Length=3mm, Lifecycle Status=Production, Min Output Voltage=3.3V, Number of Outputs=1, Operating Supply Voltage=17V, Output Configuration=Positive, Output Current=3A, Output Type=Fixed, Output Voltage=3.3V, Pins=16, RoHS=Compliant, Schedule B="8542390000, 8542390000", Synchronous Rectifier=Yes, Thickness=900µm, Topology=Buck, Width=3mm
U1_SPI: library part CMP-0315-00052-2, "Enhanced Product 3.3 V Can Transceiver with Standby Mode, 17 mA, -55 to 125 degC, 8-pin SOIC (D), Green (RoHS & no Sb/Br)", Drivers Per Package=1, Low Power Mode=Standby, Manufacturer="Texas Instruments", Rating="HiRel Enhanced Product", Supply Voltage(s)(V)=3.3, Code_JEDEC=MS-012AA, ComponentLink1Description=Datasheet, ComponentLink1URL=http://www.ti.com/general/docs/lit/getliterature.tsp?genericPartNumber=SN65HVD230M-EP&fileType=pdf, DatasheetVersion=SGLS356, Eco-Plan="Green (RoHS & no Sb/Br)", ICC(Max)(mA)=17, Isolated=No, Mounting Technology="Surface Mount", PackageDescription="8-Pin Plastic Small Outline Integrated Circuit, 4.9 x 3.9 mm, Pitch 1.27 mm Pitch", PackageReference=D0008A, PackageVersion="revM, Jun-2011", PartNumber=SN65HVD230MDREP, Receivers Per Package=1, SubFamily=CAN, Transient Pulse Protection(V)="-25 to 25"
UART_BRIDGE: library part CMP-2000-04924-1, "Single-Chip USB to URAT Bridge, 3.3 V, -40 to 85 degC, 28-Pin QFN, RoHS, Tape and Reel", Manufacturer="Silicon Labs", Operating Supply Voltage (Max)=3.6V, Operating Supply Voltage (Min)=3V, Operating Supply Voltage (Typ)=3.3V, Operating Temperature (Max)=85C, Operating Temperature (Min)=-40C, Operating Temperature Classification=Industrial, Package Description="28-Pin Quad-Flat No-Leads Package, Body 5 x 5 mm, Pitch 0.5 mm", Package Reference=QFN-28, Package Type=QFNEP, Supply Current=26mA, Data Rate=1000kbps, Datasheet URL=http://www.mouser.com/ds/2/368/CP2102-9-247052.pdf, Datasheet Version="Rev. 1.6, 12/2013", Interface Circuit Standard 1=RS-232, Manufacturer URL=http://www.silabs.com/, Mounting=SurfaceMount, Number of Channels=1, Package URL=http://www.silabs.com/Support%20Documents/TechnicalDocs/C8051T61x.pdf, Packaging=TapeandReel, Pin Count=28, Rad Hardened=No, Transmitter and Receiver FIFO Counter=No
USB-C: library part CMP-02355-000006-1, "USB TYPE C, RECEPTACLE, TOP MOUN"
Y1_Ethernet: library part CMP-03913-116876467-2, "WE-XTAL Quartz Crystal", Frequency=25MHz, Max Operating Temperature=85°C, Min Operating Temperature=-40°C, Height=800µm, Length=3.2mm, Width=2.5mm

## Free pads (board coordinates)
  round 2.6 hole 2.6: 3(80.645,56.642) 4(80.645,80.772)

## Via types
v1: diameter 0.4, hole 0.3, Top Layer to Bottom Layer, 280 vias
v2: diameter 0.5, hole 0.4, Top Layer to Bottom Layer, 18 vias
v3: diameter 0.6, hole 0.3, Top Layer to Bottom Layer, 12 vias
v4: diameter 0.5, hole 0.2, Top Layer to Bottom Layer, 9 vias
v5: diameter 0.5, hole 0.3, Top Layer to Bottom Layer, 5 vias

## Nets (pads, with @x,y where several pads share a name; then routed paths per layer and width w, separated by ;. In a path a pad name is that pad's centre, name@x,y a point inside that pad or via, vN(x,y) a via of type N, cw(c..) or ccw(c..) an arc to the next point about the centre after c; other vN are vias at no path point)
3V3: "J1_SD Card.4" "L1_Power Reg.2" "RS485 Transceiver.8" ANALOG_CH0_CH3.5 ANALOG_CH4_CH7.5 C1_GPIO.1 C1_I2C.1 C2_CAN.2 C2_I2C.1 C5.2 C6.2 C6_Ethernet.2 C7.1 C7_Ethernet.2 C8.2 C8_Ethernet.2 C8_PWRFLTR.2 C9.1 C9_Ethernet.2 C10.1 C10_Ethernet.2 C11.1 C11_Ethernet.2 C12.1 C14.1 C15.1 C20.1 C21.1 C_485.1 COUT.1 DIGITAL_IN.5 DIGITAL_OUT.5 ESP32S3.20 ESP32S3.29 ESP32S3.46 ESP32S3.55 ESP32S3.56 GPIO.2 L2.1 PCIE_.2 PCIE_.39 PCIE_.41 PCIE_.52 PHY_ETHERNET.4 PHY_ETHERNET.5 PHY_ETHERNET.10 PHY_ETHERNET.12 PSRAM.8 R1_Ethernet.2 R2_Ethernet.2 R3.1 R4.2 R4_Ethernet.1 R4_I2C.1 R5.2 R5_Ethernet.1 R5_I2C.1 R6.1 R6_Ethernet.1 R7.1 R7_Ethernet.2 R7_I2C.1 R8_Ethernet.1 R9.1 R9_Ethernet.1 R10_Ethernet.2 R_RST.1 SPI_FLASH.8 U1_Ethernet.4 U1_Ethernet.8 U1_Ethernet.11 U1_Ethernet.15 U1_Ethernet.17 U1_Ethernet.21 U1_Ethernet.28 U1_GPIO.16 U1_I2C.7 U1_I2C.10 U1_PWR.7 U1_PWR.14 U1_SPI.3 UART_BRIDGE.6 | length 893.7
  Top Layer w0.2: v1(27.102,62.103) 27.119,62.086 PCIE_.39@28.706,62.086 ; v1(27.127,61.316) 27.157,61.286 PCIE_.41@28.706,61.286 30.916,61.286 31.445,60.757 31.445,58.183 31.564,58.064 33.299,58.064 33.579,57.785 33.579,57.125 33.817,56.886 PCIE_.52@36.906,56.886 36.916,56.896 v1(39.065,56.896) ; v1(31.09,94.361) 33.007,94.361 R_RST.1@33.083,94.437 ; PCIE_.2@36.906,80.086 38.975,80.086 39.178,80.289 v1(39.192,80.289) ; C20.1@37.948,107.678 39.261,107.678 v1(39.268,107.671) ; v1(41.148,111.43) 42.113,111.43 42.612,110.931 UART_BRIDGE.6@42.612,109.401 ; v1@46.228,100.203 46.228,100.201 46.281,100.148 46.281,99.582 46.516,99.347 46.547,99.347 46.727,99.167 ESP32S3.56@46.727,99.132 ; v1(47.041,100.228) 47.041,100.175 47.127,100.089 ESP32S3.55@47.127,99.132 ; v1(48.006,109.982) 48.017,109.993 48.017,111.162 U1_PWR.7@48.027,111.173 ; U1_PWR.14@48.027,113.973 48.027,114.474 48.336,114.783 49.249,114.783 49.656,114.376 v1(52.426,114.376) ; ESP32S3.20@48.727,92.282 48.735,92.274 48.735,91.397 v1(48.743,91.389) ; v1@50.719,99.868 50.727,99.86 ESP32S3.46@50.727,99.132 ; ESP32S3.29@52.752,93.107 52.762,93.097 53.815,93.097 v1(53.857,93.056) ; v1(54.737,114.402) 54.737,114.348 54.859,114.227 54.859,112.985 COUT.1@54.853,112.979 ; PSRAM.8@58.807,90.78 58.985,90.957 59.558,90.957 59.69,91.089 v1(59.69,91.77) ; v1@59.684,91.777 SPI_FLASH.8@59.684,92.972 ; v1(61.951,111.43) 61.976,111.455 63.557,111.455 C_485.1@63.583,111.481 ; v1(64.084,109.906) 64.11,109.88 64.11,108.307 64.135,108.281 ; v1(83.337,102.159) 83.337,102.235 83.33,102.242 C2_CAN.2@83.33,103.048 83.363,103.08 83.363,103.81 83.566,104.013 U1_SPI.3@83.566,105.096 ; v1(90.043,73.711) 90.068,73.736 C7.1@91.502,73.736 ; v1(90.068,75.641) 91.4,75.641 C8.2@91.476,75.717 ; v1(91.11,72.238) 91.11,71.01 R6.1@91.142,70.978 ; R7.1@93.396,71.006 v1(93.396,72.238) ; v1(94.336,102.133) 94.336,104.255 C2_I2C.1@94.386,104.306 ; v1(96.495,55.677) 96.495,57.779 96.526,57.81 ; R4_I2C.1@97.079,104.431 97.928,104.431 98.118,104.242 v1(98.171,104.242) ; v2(97.294,72.238) 97.294,70.995 R5.2@97.333,70.956 ; R7_I2C.1@99.187,109.06 100.805,109.06 v1(100.813,109.068) ; R4.2@99.644,70.893 99.67,70.918 v2(99.67,72.212) ; v2(101.854,72.187) 101.854,71.014 R3.1@101.898,70.97 ; R2_Ethernet.2@102.159,80.258 102.159,78.969 v1(102.184,78.943) ; U1_I2C.10@103.076,107.159 103.076,108.741 103.402,109.066 104.215,109.066 v1(104.216,109.068) ; C1_I2C.1@103.937,99.06 v1(105.232,99.06) ; U1_I2C.7@104.267,105.969 v1(105.258,105.969) ; R5_I2C.1@104.433,101.6 104.458,101.625 v1(105.258,101.625) ; v1(104.597,88.113) 104.603,88.118 U1_Ethernet.28@106.444,88.118 ; v1(105.334,76.708) 105.339,76.702 R1_Ethernet.2@106.909,76.702 R6_Ethernet.1@109.821,76.702 R5_Ethernet.1@112.734,76.702 R4_Ethernet.1@115.646,76.702 ; v1(106.401,72.949) 106.426,72.949 106.459,72.916 C8_PWRFLTR.2@107.29,72.916 111.227,72.916 112.547,72.916 C10_Ethernet.2@115.341,72.916 ; U1_Ethernet.21@109.519,91.193 109.519,92.451 v1(109.525,92.456) ; U1_Ethernet.17@111.519,91.193 111.519,92.444 v1(111.531,92.456) ; v1(112.497,92.481) 112.519,92.459 U1_Ethernet.15@112.519,91.193 ; GPIO.2@114.021,61.642 114.003,61.66 114.003,64.549 C1_GPIO.1@113.985,64.567 v1(115.392,64.567) ; U1_Ethernet.4@115.094,85.618 116.377,85.618 v1(116.383,85.623) ; U1_Ethernet.8@115.094,87.618 116.344,87.618 v1(116.357,87.605) ; U1_Ethernet.11@115.094,89.118 116.372,89.118 v1(116.383,89.129) ; R7_Ethernet.2@119.978,83.617 v1(121.107,83.617) ; R8_Ethernet.1@120.131,86.055 120.179,86.103 v1(121.085,86.103) ; R10_Ethernet.2@120.207,91.034 121.094,91.034 121.119,91.008 v1(121.133,91.008) ; R9_Ethernet.1@120.232,88.875 121.119,88.875 121.144,88.9 v1(121.158,88.9) ; v1(123.139,70.637) 123.531,71.029 U1_GPIO.16@124.86,71.029 ; v1(124.384,113.843) ANALOG_CH4_CH7.5@124.384,116.078 ; C6.2@125.933,86.837 125.933,85.496 v1(125.959,85.471) ; v1(127.864,101.6) 128.727,102.464 129.669,102.464 PHY_ETHERNET.4@130.558,101.574 ; C5.2@129.388,86.88 129.388,85.561 129.413,85.535 v1(129.413,85.522) ; v1(132.842,85.471) C9.1@132.842,86.517 ; v1(136.042,85.471) C10.1@136.042,86.851 ; v1(137.693,85.09) DIGITAL_IN.5@142.113,85.09 ; v2(140.665,63.957) 140.665,63.944 141.046,63.563 141.046,61.967 140.884,61.805 DIGITAL_OUT.5@141.046,61.642
  Top Layer w0.35: SPI_FLASH.8@59.677,92.979 SPI_FLASH.8@59.684,92.972 ; v1@59.684,91.777 v1(59.69,91.77)
  Layer 2 w0.2: v1(27.127,61.316) 27.127,61.364 27.111,61.38 27.111,62.093 v1(27.102,62.103) 27.102,115.189 27.908,115.995 37.356,115.995 37.795,116.434 41.707,116.434 44.45,113.69 44.45,111.633 44.907,111.176 47.396,111.176 48.006,110.566 v1(48.006,109.982) 48.006,109.362 47.815,109.17 47.815,107.329 48.539,106.604 48.539,103.226 48.184,102.87 41.834,102.87 41.478,103.226 41.478,111.1 v1(41.148,111.43) 40.439,111.43 40.134,111.125 v1(40.081,111.125) 40.081,108.483 v1(39.268,107.671) 38.303,106.705 v1(38.303,104.115) 38.303,101.27 38.964,100.609 45.847,100.609 v1(46.228,100.228) v1(47.041,100.228) 47.396,99.873 v1@50.721,99.873 ; v1(31.09,94.361) 28.346,94.361 27.686,93.701 27.686,57.937 28.188,57.436 38.525,57.436 v1(39.065,56.896) ; v1(48.743,91.389) 48.758,91.374 48.758,89.931 48.412,89.586 v1(38.125,89.586) 37.567,89.027 37.567,81.915 v1(39.192,80.289) 39.954,79.527 39.954,56.185 41.402,54.737 95.555,54.737 v1(96.495,55.677) 96.495,59.715 95.682,60.528 88.392,60.528 87.909,61.011 87.909,75.082 88.468,75.641 v1(90.068,75.641) 90.449,75.26 90.449,74.117 v1(90.043,73.711) ; v1(50.724,99.873) 51.308,99.873 51.791,100.355 51.791,113.741 v1(52.426,114.376) 52.438,114.389 54.724,114.389 v1(54.737,114.402) 56.921,114.402 57.455,114.935 57.455,116.078 v1(57.429,116.103) 57.429,117.127 57.547,117.245 61.773,117.245 61.951,117.067 v1(61.951,111.43) 61.951,110.056 62.101,109.906 v1(64.084,109.906) 64.491,109.906 64.77,109.626 64.77,107.34 64.541,107.112 60.223,107.112 59.512,106.401 59.512,100.482 58.979,99.949 54.511,99.949 53.859,99.297 v1@53.859,93.056 ; v1(53.857,93.056) v1@53.859,93.056 ; v1@90.068,73.75 90.043,73.724 v1(90.043,73.711) ; v1(104.216,109.068) v1(100.813,109.068) 100.811,109.069 100.506,109.069 100.099,109.477 100.099,116.614 99.593,117.119 98.882,117.119 98.069,116.307 ANALOG_CH0_CH3.5@98.069,116.078 98.069,104.397 98.171,104.296 v1(98.171,104.242) 96.063,102.133 v1(94.336,102.133) 94.323,102.146 83.35,102.146 v1(83.337,102.159) 61.824,102.159 61.214,101.549 61.214,91.975 61.009,91.77 v1(59.69,91.77) 54.559,91.77 53.859,92.471 v1@53.859,93.056 ; v1@104.233,109.064 104.251,109.047 105.736,109.047 106.272,108.511 106.272,106.281 105.959,105.969 v1@105.271,105.969 ; v1(105.258,105.969) 104.75,105.461 104.75,102.133 v1(105.258,101.625) 105.245,101.613 105.245,99.073 v1(105.232,99.06) 105.246,99.06 106.236,98.069 113.817,98.069 115.189,99.441 115.189,107.264 115.722,107.798 117.5,107.798 118.008,108.306 118.008,112.547 119.304,113.843 v1(124.384,113.843) 126.797,113.843 127.864,112.776 v1(127.864,101.6) 126.848,100.584 122.047,100.584 121.107,99.644 121.107,91.008 121.145,90.97 121.145,88.963 121.107,88.925 121.121,88.911 121.121,86.117 v1@121.107,86.103 ; v1(116.357,87.605) 116.383,87.579 v1(116.383,85.623) 116.383,83.744 117.119,83.007 117.119,72.619 114.681,70.18 114.681,65.278 v1(115.392,64.567) 121.869,64.567 122.606,65.303 122.606,70.104 v1(123.139,70.637) 137.389,70.637 138.678,69.348 138.678,64.726 139.459,63.945 140.653,63.945 v2(140.665,63.957) 143.891,63.957 145.009,65.075 145.009,84.023 143.942,85.09 DIGITAL_IN.5@142.113,85.09 ; v1@116.383,87.605 v1(116.383,89.129) 116.383,91.516 115.418,92.481 v1(112.497,92.481) 112.471,92.456 v1(111.531,92.456) v1(109.525,92.456) 105.385,92.456 104.597,91.669 v1(104.597,88.113) 104.013,87.528 101.676,87.528 100.787,86.639 100.787,79.629 101.473,78.943 v1(102.184,78.943) 102.768,78.359 102.768,77.292 103.353,76.708 v1(105.334,76.708) 106.401,75.641 v1(106.401,72.949) 105.639,72.187 v2(101.854,72.187) 101.829,72.212 v2(99.67,72.212) 97.319,72.212 v2(97.294,72.238) v1(93.396,72.238) v1(91.11,72.238) 90.5,72.238 90.043,72.695 v1(90.043,73.711) ; v1(121.085,86.103) 121.096,86.092 121.096,83.628 v1(121.107,83.617) 121.107,83.574 121.674,83.007 125.349,83.007 125.654,83.312 125.654,85.166 v1(125.959,85.471) 129.349,85.471 129.399,85.522 v1(129.413,85.522) ; v1@129.427,85.522 129.477,85.471 v1(132.842,85.471) v1(136.042,85.471) 136.064,85.471 136.445,85.09 v1(137.693,85.09) ; PHY_ETHERNET.4@130.558,101.574 131.828,101.574 PHY_ETHERNET.5@133.098,102.844 134.646,102.844 135.331,102.159 135.331,98.806 135.713,98.424 PHY_ETHERNET.10@142.828,98.424 145.998,98.424 146.888,99.314 146.888,107.569 145.923,108.534 PHY_ETHERNET.12@142.828,108.534
  Bottom Layer w0.2: v1(38.125,89.586) 39.547,89.586 R9.1@39.572,89.611 ; v1(38.303,104.115) 38.322,104.134 39.694,104.134 39.928,103.899 39.928,102.452 40.488,101.892 L2.1@40.488,101.219 ; C21.1@39.791,109.912 39.807,109.928 39.807,110.85 v1(40.081,111.125) ; C14.1@49.344,100.665 49.344,101.058 49.474,101.189 50.219,101.189 50.338,101.07 C15.1@50.338,100.665 ; C15.1@50.338,100.655 50.338,100.274 v1@50.724,99.888 ; C11.1@52.629,96.21 C12.1@52.629,94.244 52.629,93.37 52.944,93.056 v1(53.857,93.056) ; 57.379,120.04 57.429,119.99 v1(57.429,116.103)
5V: C22.2 C23.1 C24.1 C_BULK.1 CAVIN.1 CIN.1 D2.1 D7.1 F1.2 U1_PWR.10 U1_PWR.11 U1_PWR.12 U1_PWR.13 UART_BRIDGE.7 UART_BRIDGE.8 USB-C.A4 USB-C.A9 USB-C.B4 USB-C.B9 | length 83.8
  Top Layer w0.2: v2@38.392,113.423 39.06,114.091 USB-C.A9@39.06,114.617 ; v2@38.622,115.667 39.193,115.667 39.31,115.784 USB-C.B4@39.31,116.317 ; v2(39.421,108.61) 39.502,108.61 39.686,108.426 UART_BRIDGE.8@41.137,108.426 ; USB-C.B9@41.81,116.034 41.81,115.389 41.561,115.14 41.561,114.619 USB-C.A4@41.56,114.617 41.56,114.068 v2@41.91,113.717 ; UART_BRIDGE.7@42.113,109.403 v2(42.113,110.058) ; U1_PWR.13@48.527,113.973 48.531,113.977 48.888,113.977 49.177,113.687 U1_PWR.12@49.177,113.323 U1_PWR.11@49.177,112.823 ; U1_PWR.10@49.177,112.323 U1_PWR.11@49.177,112.823 ; v2(50.14,112.827) 50.136,112.823 U1_PWR.11@49.177,112.823
  Top Layer w0.4: v2(38.354,113.386) v2@38.392,113.423 ; v2(38.56,115.632) v2@38.587,115.632 ; v2(41.91,113.69) v2@41.91,113.717
  Layer 2 w0.4: v2@38.541,115.536 38.354,115.35 v2(38.354,113.386) 38.354,112.819 39.421,111.752 v2(39.421,108.61) ; v2@38.541,115.586 38.587,115.632 39.302,115.632 39.537,115.397 39.537,113.906 39.771,113.671 41.891,113.671 v2(41.91,113.69) 41.91,113.663 42.113,113.46 v2(42.113,110.058) 42.443,109.728 45.999,109.728 46.812,108.915 v2(46.812,103.784) 47.218,103.378 v2(47.879,103.378) ; v2(49.632,108.026) 50.14,108.534 v2(50.14,112.827) 50.14,114.583 50.089,114.633 v2(50.089,116.256) 50.089,117.396 50.368,117.676 v2(50.368,117.729) ; v2(60.452,104.496) 60.833,104.877 60.833,106.344 61.067,106.578 v2(65.786,106.578)
  Bottom Layer w0.2: v2(46.812,103.784) 46.816,103.788 46.816,104.447 C22.2@46.82,104.451 ; C22.2@46.84,104.451 47.272,104.883 47.272,105.144 C23.1@47.722,105.594 C24.1@47.722,107.888 ; C24.1@47.676,108.026 47.768,107.934 49.458,107.934 49.55,108.026 v2(49.632,108.026) ; CIN.1@50.267,122.364 CIN.1@50.534,122.631
  Bottom Layer w0.4: v2(47.879,103.378) 47.932,103.378 49.06,104.506 D2.1@52.523,104.506 D7.1@58.09,104.506 60.289,104.506 60.3,104.496 v2(60.452,104.496) ; CIN.1@50.267,122.364 C_BULK.1@50.267,120.574 50.33,120.51 50.33,118.834 CAVIN.1@50.394,118.77 50.381,118.758 50.381,117.742 v2(50.368,117.729) ; v2(65.786,106.578) F1.2@69.086,106.578
5V_EXT: F1.1 J_PWR.1 | length 19.7
  Layer 2 w0.4: J_PWR.1@55.372,116.132 55.372,117.475 55.753,117.856 62.205,117.856 62.486,117.575 v2(62.486,110.386)
  Bottom Layer w0.4: F1.1@62.486,106.578 v2(62.486,110.386)
A_pin: "RS485 Transceiver.6" R1_RS485.1 RS485.1 | length 13.4
  Top Layer w0.203: 66.675,108.281 66.675,110.134 66.465,110.344 R1_RS485.1@66.465,111.481 66.465,113.532 66.751,113.817 71.882,113.817 72.441,114.376 RS485.1@72.441,116.107
ACTLED: R12_Ethernet.2 U1_Ethernet.27 | length 6.5
  Top Layer w0.203: R12_Ethernet.2@102.235,91.219 102.235,89.103 102.72,88.618 U1_Ethernet.27@106.444,88.618
ADDR: R_ADDR_HIGH.1 R_ADDR_LOW.2 U1_I2C.11 | length 8
  Top Layer w0.203: R_ADDR_HIGH.1@100.752,110.16 100.752,110.735 100.889,110.871 103.716,110.871 103.835,110.752 R_ADDR_LOW.2@103.835,110.152 ; U1_I2C.11@102.576,107.159 102.576,109.003 103.133,109.559 103.45,109.559 103.569,109.678 103.569,109.886 R_ADDR_LOW.2@103.792,110.109
ADS_ALERT: ESP32S3.15 R7_I2C.2 U1_I2C.12 | length 97.5
  Top Layer w0.203: v1(42.113,85.852) 42.113,86.182 42.443,86.512 44.425,86.512 44.78,86.868 44.78,89.789 46.727,91.736 ESP32S3.15@46.727,92.282 ; v1(90.221,82.448) 90.272,82.448 90.957,83.134 90.957,106.68 v1(90.932,106.705) ; v1(98.628,107.594) 98.628,107.627 99.162,108.16 R7_I2C.2@99.187,108.16 ; R7_I2C.2@99.212,108.153 101.778,108.153 102.076,107.855 U1_I2C.12@102.076,107.159
  Bottom Layer w0.203: v1(42.113,85.852) 42.113,84.099 43.764,82.448 v1(90.221,82.448) ; v1(90.932,106.705) 90.932,107.163 91.364,107.594 v1(98.628,107.594)
AIN0_ADC: C4_I2C.1 R8_I2C.2 U1_I2C.15 | length 8.2
  Top Layer w0.203: C4_I2C.1@98.984,105.747 98.519,105.747 98.176,106.091 98.176,109.722 98.815,110.362 R8_I2C.2@99.085,110.362 ; C4_I2C.1@99.009,105.747 99.653,105.747 99.932,105.469 U1_I2C.15@101.386,105.469
AIN0_EXT: ANALOG_CH0_CH3.1 R8_I2C.1 | length 17.7
  Top Layer w0.203: R8_I2C.1@99.085,112.152 99.091,112.146 100.615,112.146 v1(100.863,112.395) ; v1(101.092,113.716) 101.117,113.69 112.852,113.69 113.309,114.148 ANALOG_CH0_CH3.1@113.309,116.078
  Bottom Layer w0.203: v1(100.863,112.395) 100.863,113.498 101.081,113.716 v1(101.092,113.716)
AIN1_ADC: C5_I2C.1 R9_I2C.2 U1_I2C.16 | length 14.8
  Top Layer w0.203: v1(97.028,109.855) C5_I2C.1@97.028,109.01 C5_I2C.1@97.079,109.06 ; C5_I2C.1@97.053,109.01 97.841,108.222 97.841,105.512 98.069,105.283 98.069,105.279 98.379,104.969 U1_I2C.16@101.386,104.969 ; v1(100.838,111.633) 100.838,111.658 101.07,111.89 R9_I2C.2@101.936,111.89
  Bottom Layer w0.203: v1(97.028,109.855) 97.434,110.261 100.406,110.261 100.838,110.693 v1(100.838,111.633)
AIN1_EXT: ANALOG_CH0_CH3.2 R9_I2C.1 | length 9.7
  Top Layer w0.203: R9_I2C.1@103.726,111.89 103.729,111.887 v1(107.01,111.887)
  Bottom Layer w0.203: v1(107.01,111.887) 108.966,111.887 109.499,112.42 ANALOG_CH0_CH3.2@109.499,116.078
AIN2_ADC: C6_I2C.1 R10_I2C.2 U1_I2C.1 | length 16.5
  Top Layer w0.203: v1(100.457,102.133) 100.464,102.126 C6_I2C.1@101.295,102.126 101.796,102.126 102.076,102.407 U1_I2C.1@102.076,104.278 ; v1(106.35,99.339) 107.263,99.339 R10_I2C.2@107.289,99.365
  Bottom Layer w0.203: v1(100.457,102.133) 98.73,102.133 98.374,101.778 98.374,100.609 98.704,100.279 105.41,100.279 v1(106.35,99.339)
AIN2_EXT: ANALOG_CH0_CH3.3 R10_I2C.1 | length 19.4
  Top Layer w0.203: v1(105.689,106.807) v1(105.689,111.43) ; v1(105.733,103.581) v1(105.733,104.572) ; v1(108.204,100.711) 108.839,100.711 109.093,100.457 109.093,99.379 R10_I2C.1@109.079,99.365
  Bottom Layer w0.203: v1(105.689,106.807) 105.711,106.785 105.711,104.593 v1(105.733,104.572) ; v1(105.689,111.43) ANALOG_CH0_CH3.3@105.689,116.078 ; v1(105.733,103.581) 106.045,103.269 106.045,101.342 106.676,100.711 v1(108.204,100.711)
AIN3_ADC: C7_I2C.1 R11_I2C.2 U1_I2C.2 | length 17.1
  Top Layer w0.203: R11_I2C.2@96.901,100.1 106.146,100.1 106.586,100.54 C7_I2C.1@106.586,101.702 106.586,102.355 106.121,102.819 102.921,102.819 102.576,103.164 U1_I2C.2@102.576,104.278
AIN3_EXT: ANALOG_CH0_CH3.4 R11_I2C.1 | length 18.8